# Altium PCB PCB1.PcbDoc
Units mil, origin at the board's own origin, x right, y up, seen from the top; angles counter-clockwise.
Board outline 4625 x 2800 mil, 2 copper layers (Top Layer, Bottom Layer); 25 components, 76 nets, 189 pads, 43 vias.
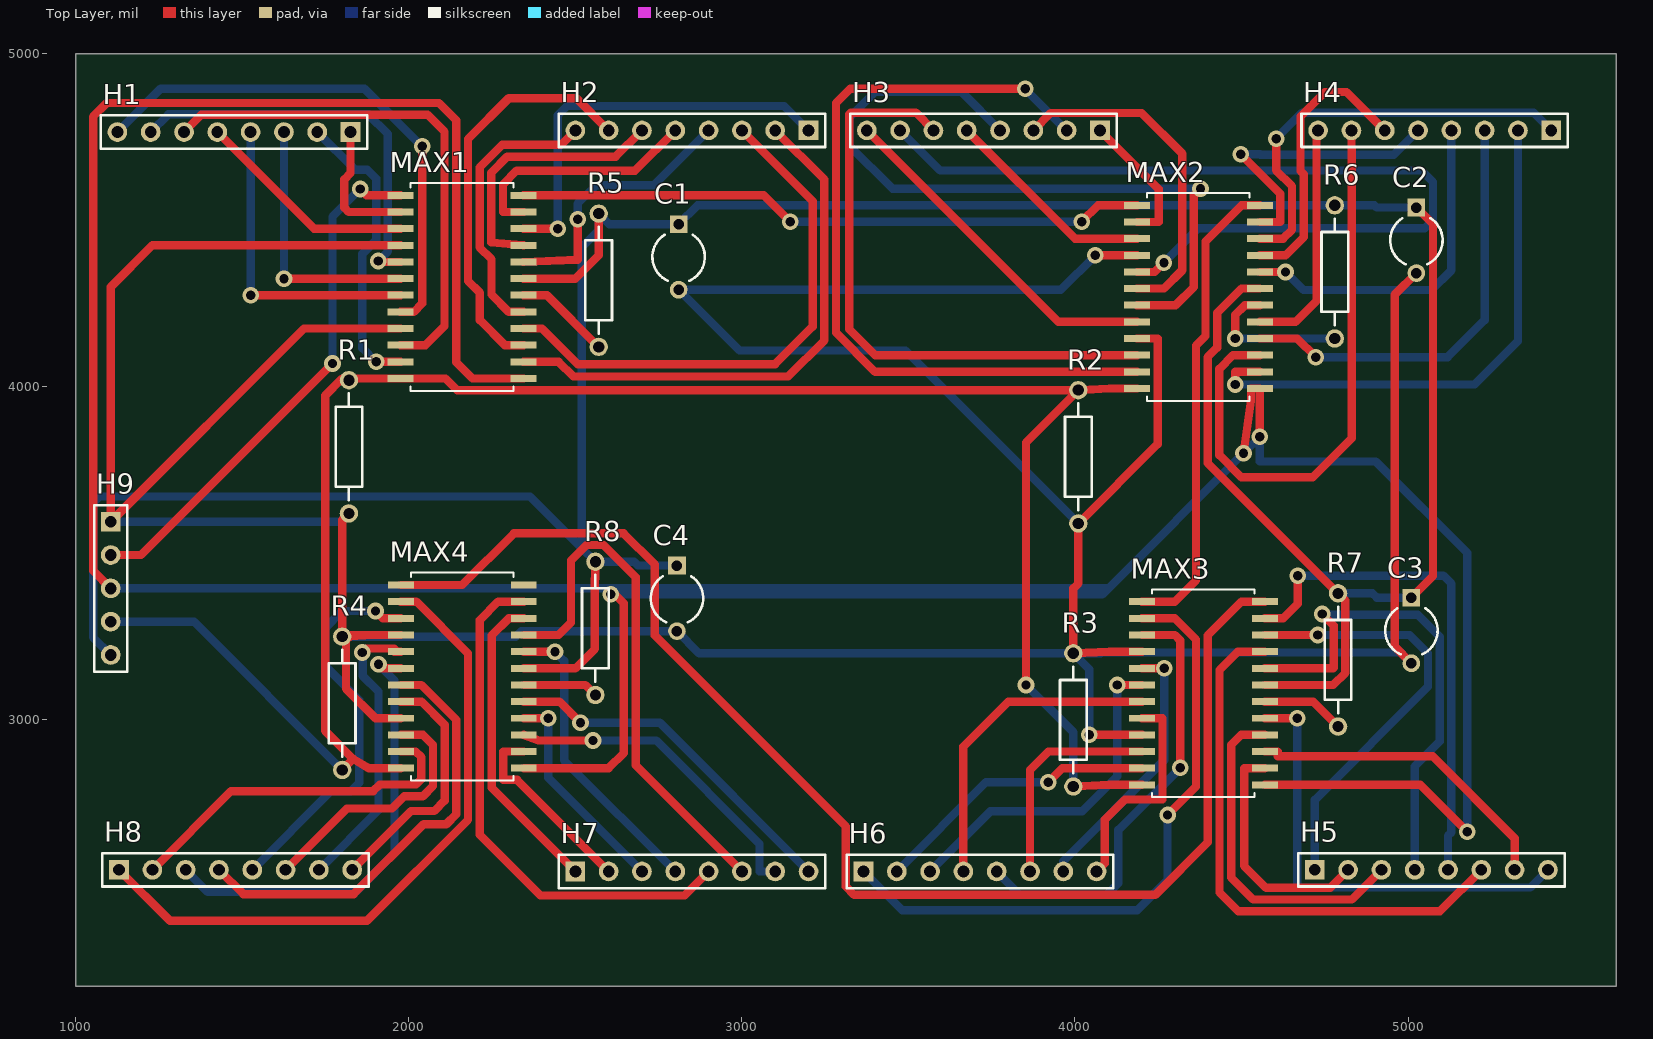
[diagram p0: Top Layer view]
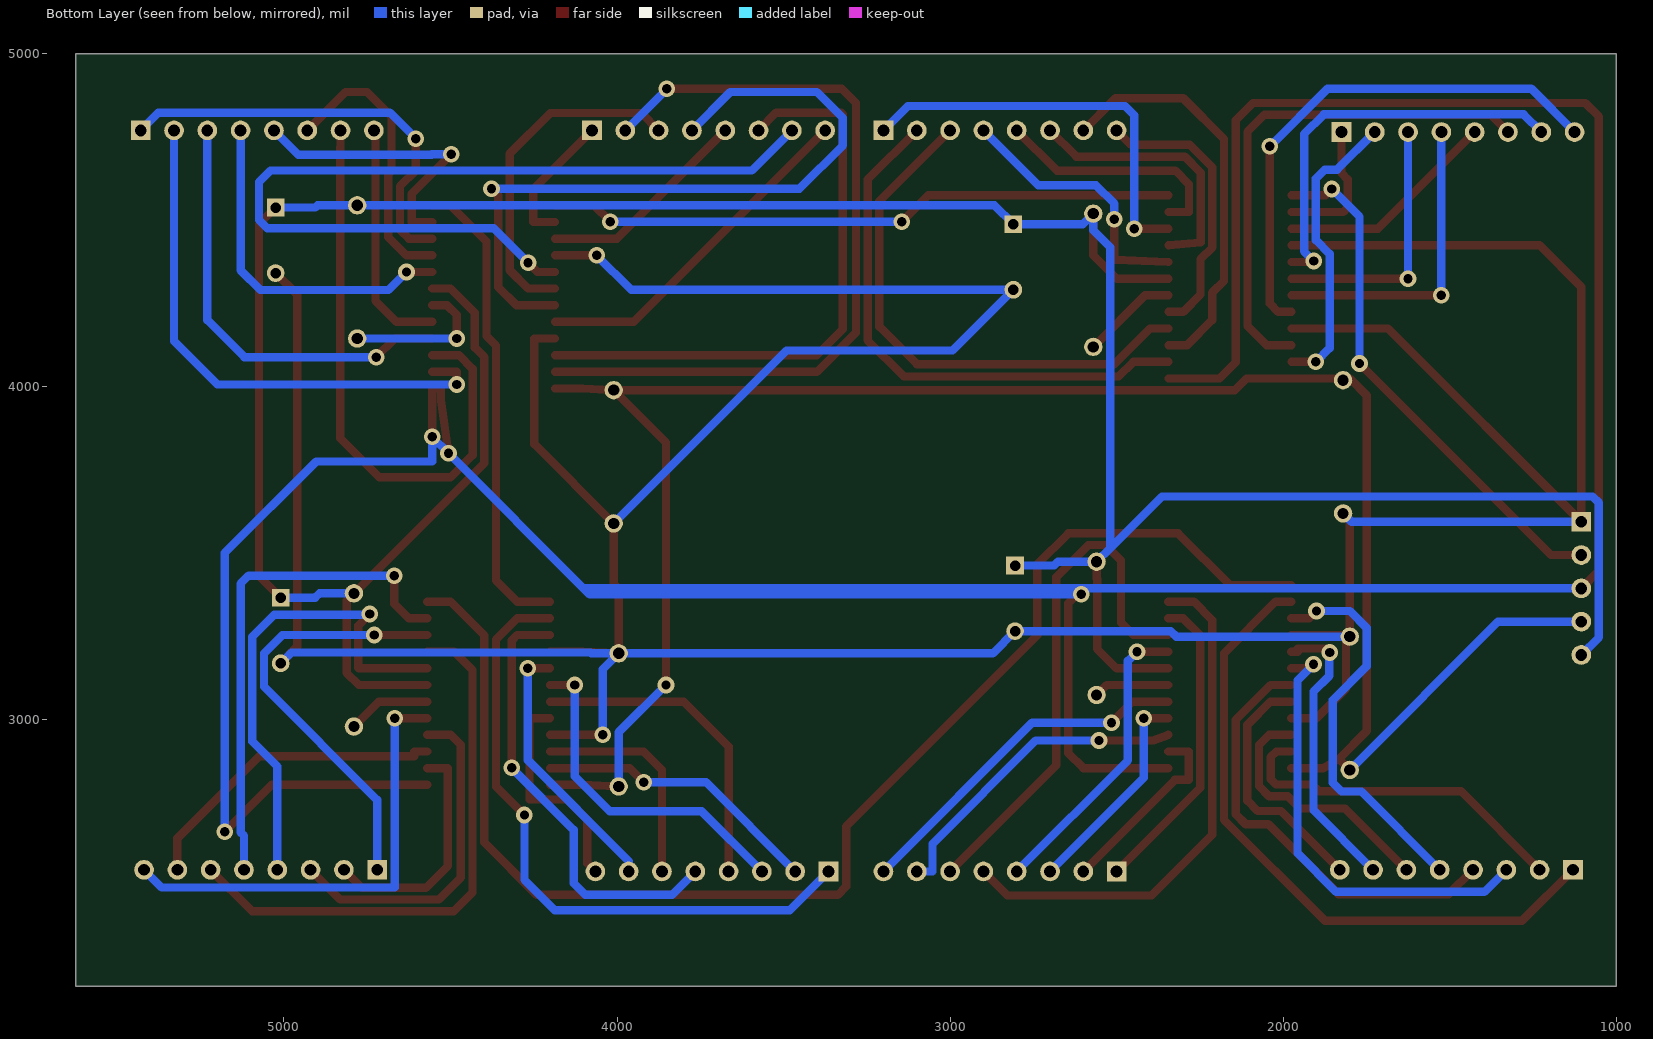
[diagram p1: Bottom Layer view, seen from below]

## Layer stack, top to bottom
Top Solder: solder mask 0.4, Solder Resist, Dk 3.5
Top Layer: signal copper 1.4
Dielectric 1: dielectric 12.6, FR-4, Dk 4.8
Bottom Layer: signal copper 1.4
Bottom Solder: solder mask 0.4, Solder Resist, Dk 3.5

## Board outline
1000,2200 5625,2200 5625,5000 1000,5000

## Design rules (kind name [scope] priority, off if disabled: settings)
Clearance [All] p1: gap=10 ignorepadtopadclearanceinfootprint=FALSE except(0: Arc-Hole Track-Hole SMDPad-Hole THPad-Hole Via-Hole Fill-Hole Poly-Hole Region-Hole Text-Hole)
MinimumSolderMaskSliver [All] p1: minsoldermaskwidth=1
PolygonConnect [All] p1: connectstyle=Relief reliefconductorwidth=10 reliefentries=4 polygonreliefangle="90 Angle" airgapwidth=10
RoutingVias [All] p1: holewidth=28 width=50 viastyle="Through Hole" minholewidth=28 minwidth=50 maxholewidth=28 maxwidth=50
SilkToSilkClearance [All] p1: silktosilkclearance=4
SilkToSolderMaskClearance [IsPad] p1: minsilkscreentomaskgap=4 clearancetoexposedcopper=TRUE
SolderMaskExpansion [All] p1: expansion=4 istentingtop=FALSE
Width [All] p1: maxlimit=25 minlimit=20 preferedwidth=25 minimp=50.000000 maximp=50.000000 favimp=50.000000
27 further rules are at their usual default settings.

## Components (designator, comment, footprint, x,y, rotation, side; value= is the part's Value field where it differs from the comment)
C1 "Cap2" CAPR5-4X5 2810,4390 r270 top value=10µF
C2 "Cap2" CAPR5-4X5 5025,4440 r270 top value=10µF
C3 "Cap2" CAPR5-4X5 5010,3268.43 r270 top value=10µF
C4 "Cap2" CAPR5-4X5 2805,3365 r270 top value=10µF
H1 "Header 8" HDR1X8 1825,4765 r180 top
H2 "Header 8" HDR1X8 3200,4770 r180 top
H3 "Header 8" HDR1X8 4075,4770 r180 top
H4 "Header 8" HDR1X8 5430,4770 r180 top
H5 "Header 8" HDR1X8 4720,2550 r0 top
H6 "Header 8" HDR1X8 3365,2545 r0 top
H7 "Header 8" HDR1X8 2500,2545 r0 top
H8 "Header 8" HDR1X8 1130,2550 r0 top
H9 "Header 5" HDR1X5 1105,3595 r270 top
MAX1 "MAX7219CWGT" *21-0042B_24 2159.5,4300 r0 top
MAX2 "MAX7219CWGT" *21-0042B_24 4370.5,4270 r0 top
MAX3 "MAX7219CWGT" *21-0042B_24 4385.5,3080 r0 top
MAX4 "MAX7219CWGT" *21-0042B_24 2160.5,3130 r0 top
R1 "Res2" AXIAL-0.4 1820,3820 r90 top value=10K
R2 "Res2" AXIAL-0.4 4010,3790 r90 top value=10K
R3 "Res2" AXIAL-0.4 3995,3000 r270 top value=10K
R4 "Res2" AXIAL-0.4 1800,3050 r270 top value=10K
R5 "Res2" AXIAL-0.4 2570,4320 r270 top value=27K
R6 "Res2" AXIAL-0.4 4780,4345 r270 top value=27K
R7 "Res2" AXIAL-0.4 4790,3180 r270 top value=27K
R8 "Res2" AXIAL-0.4 2560,3275 r270 top value=27K

## Footprints (in the part's own frame and the unit in brackets; to place one, negate y for a bottom-side part, rotate by r counter-clockwise, add the part's x,y. Pads: shape width x height; smd on the part's side, far side on the other; paste and mask are expansions set on the pad)
*21-0042B_24 [mil]
  rect 78x21 smd: 1(-184.5,275) 2(-184.5,225) 3(-184.5,175) 4(-184.5,125) 5(-184.5,75) 6(-184.5,25) 7(-184.5,-25) 8(-184.5,-75) 9(-184.5,-125) 10(-184.5,-175) 11(-184.5,-225) 12(-184.5,-275) 13(184.5,-275) 14(184.5,-225) 15(184.5,-175) 16(184.5,-125) 17(184.5,-75) 18(184.5,-25) 19(184.5,25) 20(184.5,75) 21(184.5,125) 22(184.5,175) 23(184.5,225) 24(184.5,275)
  silkscreen extent -154,-312 154,312
AXIAL-0.4 [mm] "Axial Device, Thru-Hole; 2 Leads; 0.4 in Pin Spacing"
  round 1.4 hole 0.85: 1(-5.08,0) 2(5.08,0)
  silkscreen extent -4.06,-1.02 4.06,1.02
CAPR5-4X5 [mm] "Capacitor; 2 Leads"
  rect 1.35x1.35 hole 0.8: 1(-2.5,0)
  round 1.35 hole 0.8: 2(2.5,0)
  silkscreen extent -1.69,-2 1.82,2
HDR1X5 [mm] "Connector; Header; 5 Position"
  rect 1.5x1.5 hole 0.9: 1(0,0)
  round 1.5 hole 0.9: 2(2.54,0) 3(5.08,0) 4(7.62,0) 5(10.16,0)
  silkscreen extent -1.27,-1.27 11.43,1.27
HDR1X8 [mm] "Connector; Header; 8 Position"
  rect 1.5x1.5 hole 0.9: 1(0,0)
  round 1.5 hole 0.9: 2(2.54,0) 3(5.08,0) 4(7.62,0) 5(10.16,0) 6(12.7,0) 7(15.24,0) 8(17.78,0)
  silkscreen extent -1.27,-1.27 19.05,1.27

## Part data
C1 C2 C3 C4: "Capacitor", PackageDescription="Capacitor; 2 Leads", PackageReference=CAPR5-4X5, Published=23-Sep-2002, Publisher="Altium Limited"
H1 H2 H3 H4 H5 H6 H7 H8: "Header, 8-Pin", LatestRevisionDate=17-Jul-2002, LatestRevisionNote="Re-released for DXP Platform.", Publisher="Altium Limited"
H9: "Header, 5-Pin", LatestRevisionDate=17-Jul-2002, LatestRevisionNote="Re-released for DXP Platform.", Publisher="Altium Limited"
R1 R2 R3 R4: library part Res2_1, "Resistor", LatestRevisionDate=17-Jul-2002, LatestRevisionNote="Re-released for DXP Platform.", PackageDescription="Axial Device, Thru-Hole; 2 Leads; 0.4 in Pin Spacing", PackageReference=AXIAL-0.4, Published=8-Jun-2000, Publisher="Altium Limited"
R5 R6 R7 R8: "Resistor", LatestRevisionDate=17-Jul-2002, LatestRevisionNote="Re-released for DXP Platform.", PackageDescription="Axial Device, Thru-Hole; 2 Leads; 0.4 in Pin Spacing", PackageReference=AXIAL-0.4, Published=8-Jun-2000, Publisher="Altium Limited"
MAX1 MAX2 MAX3 MAX4: SnapEDA_Link=https://www.snapeda.com/parts/MAX7219CWG/Maxim%20Integrated/view-part/3218774/?ref=snap

## Via types
v1: diameter 50, hole 28, Top Layer to Bottom Layer, 43 vias

## Nets (pads, with @x,y where several pads share a name; then routed paths per layer and width w, separated by ;. In a path a pad name is that pad's centre, name@x,y a point inside that pad or via, vN(x,y) a via of type N, cw(c..) or ccw(c..) an arc to the next point about the centre after c; other vN are vias at no path point)
NetC1_1: C1.1 C2.1 C3.1 C4.1 H9.5 MAX1.19 MAX2.19 MAX3.19 MAX4.19 R5.1 R6.1 R7.1 R8.1 | length 9847.9
  Top Layer w25: MAX1.19 2500,4325 2570,4395 R5.1 ; MAX4.19 2500,3155 2558.5,3213.5 2558.5,3423 2560,3424.5 R8.1 ; MAX2.19 4500,4295 4427,4222 4427,4117.5 4398.5,4089 4398.5,3771.5 R7.1 4811.5,3358.5 4811.5,3141.5 4775,3105 MAX3.19 ; C3.1 5075,3431.85 5075,4488.43 C2.1
  Bottom Layer w25: H9.5 1052,3248 1052,3652 1071,3671 2364,3671 2519,3516 ; C4.1 2687.57,3463.43 2676,3475 R8.1 2519,3516 ; R7.1 4893,3380 4906.15,3366.85 C3.1 ; C2.1 4905.57,4538.43 4899,4545 R6.1 2866.57,4545 C1.1 2601.57,4488.43 R5.1 2570,4470 2519,4419 2519,3516
NetC1_2: C1.2 C2.2 C3.2 C4.2 H9.1 MAX1.4 MAX1.9 MAX2.4 MAX2.9 MAX3.4 MAX3.9 MAX4.4 MAX4.9 R1.1 R2.1 R3.1 R4.1 | length 13581
  Top Layer w25: R1.1 1800,3600 R4.1 R4.1@1822.72,3251.22 ; MAX1.9 1685,4175 H9.1 1105,4300 1230.5,4425.5 1914.5,4425.5 1915,4425 MAX1.4 ; MAX4.9 1900,3005 1811.5,3093.5 1811.5,3240 R4.1@1822.72,3251.22 ; MAX4.4 1893,3255 ; v1(4043,2955) MAX3.9 ; v1(4061,4395) MAX2.4 ; MAX2.9 4248,4145 4248,3828 R2.1 4010,3410 3995,3395 R3.1 4103,3205 MAX3.4 ; C3.2 4960,3220 4960,4276.57 C2.2 ; R4.1@1822.72,3251.22 1893,3255 ; R4.1@1822.72,3251.22 1826.5,3255 1893,3255
  Bottom Layer w25: H9.1 1795,3595 R1.1 ; R4.1 2321,3250 2337.57,3266.57 C4.2 2871.57,3200 R3.1 ; R2.1 3491,4109 2992.57,4109 C1.2 3957.57,4291.57 v1(4061,4395) ; v1(4043,2955) 4043,3152 R3.1 ; C3.2 4977.5,3202.5 4079.5,3202.5 4077,3200 R3.1
NetH9_2: H9.2 MAX1.1 | length 1591.4
  Top Layer w25: H9.2 1196,3495 v1(1771,4070) ; v1(1854,4594) 1873,4575 MAX1.1
  Bottom Layer w25: v1(1771,4070) 1771,4511 v1(1854,4594)
NetH9_3: H9.3 MAX1.13 MAX2.13 MAX3.13 MAX4.13 | length 12156.2
  Top Layer w25: H9.3 1052,3448 1052,4811 1093.03,4852.03 2090.47,4852.03 2142.5,4800 2142.5,4073.5 2191,4025 MAX1.13 ; MAX4.13 2600,2855 2645.67,2900.67 2645.67,3350 2618.67,3377 v1(2606,3377) ; v1(4506,3801) 4528.5,3959 4528.5,3995 MAX2.13 v1(4555,3850) ; MAX3.13 5037,2805 v1(5178,2664)
  Bottom Layer w25: H9.3 4100,3395 ; v1(2606,3377) 4082,3377 4100,3395 ; v1(5178,2664) 5178,3501 4903,3776 4555,3776 v1(4555,3850) v1(4506,3801) 4100,3395
NetH9_4: H9.4 MAX1.12 MAX2.12 MAX3.12 MAX4.12 R1.2 R2.2 R3.2 R4.2 | length 6202.4
  Top Layer w25: R4.2 1833,2883 ; R1.2 R1.2@1825,4025 ; MAX4.12 1879.5,2855 1833,2883 ; v1(3853,3105) 3853,3833 R2.2 ; R3.2 4103,2805 MAX3.12 ; MAX2.12 4103,3995 R2.2 ; R1.2@1825,4025 1895,4025 MAX1.12 2110,4025 2145,3990 R2.2 ; R1.2@1825,4025 1800,4025 1749,3974 1749,2967 1833,2883
  Bottom Layer w25: H9.4 1355,3295 R4.2 ; v1(3853,3105) 3995,2963 R3.2
NetMAX1_18: MAX1.18 R5.2 | length 290.2
  Top Layer w25: MAX1.18 2415,4275 R5.2
NetMAX1_24: MAX1.24 MAX2.1 | length 1895
  Top Layer w25: MAX1.24 3066,4575 v1(3145,4496) ; v1(4020,4496) 4069,4545 MAX2.1
  Bottom Layer w25: v1(3145,4496) v1(4020,4496)
NetMAX2_18: MAX2.18 R6.2 | length 456
  Top Layer w25: v1(4481,4145) 4481,4216 4510,4245 MAX2.18
  Bottom Layer w25: v1(4481,4145) R6.2
NetMAX2_24: MAX2.24 MAX3.1 | length 1426.8
  Top Layer w25: MAX3.1 4300,3355 4363.5,3418.5 4363.5,4124 4392,4152.5 4392,4437 4500,4545 MAX2.24
NetMAX3_18: MAX3.18 R7.2 | length 251.1
  Top Layer w25: MAX3.18 4715,3055 R7.2
NetMAX3_24: MAX3.24 MAX4.1 | length 4066.2
  Top Layer w25: MAX4.1 2160,3405 2315.06,3560.06 2645.06,3560.06 2738.5,3466.62 2738.5,3253.5 3312,2680 3312,2500 3337,2475 4241,2475 4398.5,2632.5 4398.5,3253.5 4500,3355 MAX3.24
NetMAX4_18: MAX4.18 R8.2 | length 227.4
  Top Layer w25: MAX4.18 2530,3105 R8.2
S1: H1.1 MAX1.2 | length 408.7
  Top Layer w25: H1.1 1825,4641.48 1806.5,4622.98 1806.5,4537.79 1819.29,4525 MAX1.2
S2: H1.5 MAX1.3 | length 670.1
  Top Layer w25: H1.5 1715,4475 MAX1.3
S3: H1.7 MAX1.5 | length 1219.6
  Top Layer w25: v1(1908,4378) 1911,4375 MAX1.5
  Bottom Layer w25: H1.7 1278,4818 1878,4818 1937,4759 1937,4407 v1(1908,4378)
S4: H1.3 MAX1.6 | length 790
  Top Layer w25: v1(1625,4325) MAX1.6
  Bottom Layer w25: v1(1625,4325) H1.3
S5: H1.4 MAX1.7 | length 940
  Top Layer w25: v1(1525,4275) MAX1.7
  Bottom Layer w25: v1(1525,4275) H1.4
S6: H1.8 MAX1.8 | length 1587.9
  Top Layer w25: MAX1.8 2015,4225 2040,4250 v1(2040,4722)
  Bottom Layer w25: H1.8 1255,4895 1867,4895 v1(2040,4722)
S7: H1.6 MAX1.10 | length 1564.3
  Top Layer w25: H1.6 1377.03,4817.03 2055.97,4817.03 2107,4766 2107,4182 2050,4125 MAX1.10
S8: H1.2 MAX1.11 | length 892.4
  Top Layer w25: v1(1901.77,4075) MAX1.11
  Bottom Layer w25: H1.2 1837.94,4652.06 1875,4652.06 1901.77,4625.29 1901.77,4440.51 1860.5,4399.24 1860.5,4116.27 v1(1901.77,4075)
S9: H2.5 MAX1.23 | length 729.1
  Top Layer w25: MAX1.23 2282.5,4525 2282.5,4608 2323.5,4649 2679,4649 H2.5
S10: H2.1 MAX1.22 | length 1237.8
  Top Layer w25: MAX1.22 v1(2447,4475)
  Bottom Layer w25: v1(2447,4475) 2447,4815 2475,4843 3127,4843 H2.1
S11: H2.6 MAX1.21 | length 811.5
  Top Layer w25: MAX1.21 2247.5,4433.5 2247.5,4643 2295.5,4691 2621,4691 H2.6
S12: H2.4 MAX1.20 | length 815.3
  Top Layer w25: MAX1.20 2507,4382 v1(2507,4503)
  Bottom Layer w25: v1(2507,4503) 2507,4550 2562,4605 2735,4605 H2.4
S13: H2.8 MAX1.17 | length 847.6
  Top Layer w25: MAX1.17 2300,4225 2248,4277 2248,4383.5 2212.5,4419 2212.5,4658.71 2280.23,4726.44 2456.44,4726.44 H2.8
S14: H2.3 MAX1.16 | length 1636.9
  Top Layer w25: MAX1.16 2400,4175 2507,4068 3100,4068 3212.5,4180.5 3212.5,4557.5 H2.3
S15: H2.7 MAX1.15 | length 1234
  Top Layer w25: MAX1.15 2288,4125 2213,4200 2213,4282.5 2177.5,4318 2177.5,4744 2300,4866.5 2503.5,4866.5 H2.7
S16: H2.2 MAX1.14 | length 1658.3
  Top Layer w25: MAX1.14 2450,4075 2494,4031 3139,4031 3247.5,4139.5 3247.5,4622.5 H2.2
S17: H3.1 MAX2.2 | length 412.9
  Top Layer w25: H3.1 4251,4594 4251,4495 MAX2.2
S18: H3.5 MAX2.3 | length 645.6
  Top Layer w25: H3.5 4000,4445 MAX2.3
S19: H3.7 MAX2.5 | length 2731.8
  Top Layer w25: MAX2.5 4239,4345 v1(4267,4373)
  Bottom Layer w25: H3.7 3595.29,4649.71 5040.29,4649.71 5075,4615 5075,4501 5050,4476 4370,4476 v1(4267,4373)
S20: H3.3 MAX2.6 | length 1027.9
  Top Layer w25: H3.3 3927.03,4822.03 4200,4822.03 4322,4700.03 4322,4350 4267,4295 MAX2.6
S21: H3.4 MAX2.7 | length 2220.9
  Top Layer w25: MAX2.7 4302,4245 4357,4300 4357,4575 v1(4377,4595)
  Bottom Layer w25: H3.4 3660,4885 3400,4885 3322,4807 3322,4725 3452,4595 v1(4377,4595)
S22: H3.8 MAX2.8 | length 1049.2
  Top Layer w25: H3.8 3950,4195 MAX2.8
S23: H3.6 MAX2.10 | length 1818.3
  Top Layer w25: H3.6 3522,4823 3327,4823 3322,4818 3322,4173 3400,4095 MAX2.10
S24: H3.2 MAX2.11 | length 2403.3
  Top Layer w25: v1(3850.5,4894.5) 3325,4894.5 3282.5,4852 3282.5,4162.5 3400,4045 MAX2.11
  Bottom Layer w25: v1(3850.5,4894.5) H3.2
S25: H4.5 MAX2.23 | length 876.2
  Top Layer w25: v1(4498,4698) 4616.5,4579.5 4616.5,4495 MAX2.23
  Bottom Layer w25: v1(4498,4698) 4555.6,4698 4556.5,4697.1 4957.1,4697.1 H4.5
S26: H4.1 MAX2.22 | length 1280.9
  Top Layer w25: MAX2.22 4625,4445 4651.5,4471.5 4651.5,4602.5 4604,4650 v1(4604,4745)
  Bottom Layer w25: v1(4604,4745) 4682,4823 5377,4823 H4.1
S27: H4.6 MAX2.21 | length 851.8
  Top Layer w25: MAX2.21 4632,4395 4687,4450 4687,4638 4677,4648 4677,4812 4750,4885 4815,4885 H4.6
S28: H4.4 MAX2.20 | length 1041.8
  Top Layer w25: MAX2.20 v1(4632,4345)
  Bottom Layer w25: v1(4632,4345) 4686,4291 5071,4291 5130,4350 H4.4
S29: H4.8 MAX2.17 | length 710.2
  Top Layer w25: MAX2.17 4662,4195 4725,4258 4725,4765 H4.8
S30: H4.3 MAX2.16 | length 1314.2
  Top Layer w25: MAX2.16 4667,4145 v1(4723,4089)
  Bottom Layer w25: v1(4723,4089) 5119,4089 5230,4200 H4.3
S31: H4.7 MAX2.15 | length 1795.2
  Top Layer w25: MAX2.15 4474.5,4095 4433.5,4054 4433.5,3795 4500,3728.5 4713.5,3728.5 4831,3846 4831,4677 H4.7
S32: H4.2 MAX2.14 | length 1647.8
  Top Layer w25: v1(4481,4007) 4481,4045 MAX2.14
  Bottom Layer w25: v1(4481,4007) 5200,4007 5330,4137 H4.2
S33: H5.5 MAX3.23 | length 1535.3
  Top Layer w25: MAX3.23 4625,3305 4669,3349 v1(4669,3433)
  Bottom Layer w25: v1(4669,3433) 5106,3433 5130,3409 5130,2662.61 5120,2652.61 H5.5
S34: H5.1 MAX3.22 | length 1303.6
  Top Layer w25: MAX3.22 v1(4729,3255)
  Bottom Layer w25: H5.1 4720,2760 5060,3100 5060,3200 5005,3255 v1(4729,3255)
S35: H5.6 MAX3.21 | length 1687.3
  Top Layer w25: MAX3.21 4489,3205 4434,3150 4434,2482 4490,2426 5096,2426 H5.6
S36: H5.4 MAX3.20 | length 1495.1
  Top Layer w25: MAX3.20 4775,3155 4776.5,3156.5 4776.5,3283.5 v1(4742,3318)
  Bottom Layer w25: v1(4742,3318) 4744,3316 5029,3316 5095,3250 5095,2935 5020,2860 H5.4
S37: H5.8 MAX3.17 | length 1380
  Top Layer w25: MAX3.17 v1(4667,3005)
  Bottom Layer w25: v1(4667,3005) 4667,2497 5367,2497 H5.8
S38: H5.3 MAX3.16 | length 1026.6
  Top Layer w25: MAX3.16 4499,2955 4469,2925 4469,2527 4535,2461 4831,2461 H5.3
S39: H5.7 MAX3.15 | length 960.7
  Top Layer w25: MAX3.15 4609,2905 4609,2891 5073.73,2891 5320,2644.73 H5.7
S40: H5.2 MAX3.14 | length 716.7
  Top Layer w25: MAX3.14 4508,2855 4508,2562 4574,2496 4766,2496 H5.2
S41: H6.1 MAX3.2 | length 1944.5
  Top Layer w25: MAX3.2 4300,3305 4363.5,3241.5 4363.5,2799.81 v1(4278,2714.31)
  Bottom Layer w25: H6.1 3481,2429 4187,2429 4278,2520 v1(4278,2714.31)
S42: H6.5 MAX3.3 | length 1336.2
  Top Layer w25: MAX3.3 4300,3255 4316,3239 v1(4316,2856)
  Bottom Layer w25: H6.5 3835,2475 4095,2475 4130,2510 4130,2670 v1(4316,2856)
S43: H6.7 MAX3.5 | length 802.5
  Top Layer w25: MAX3.5 v1(4268,3155)
  Bottom Layer w25: H6.7 3965,2576 4268,2879 v1(4268,3155)
S44: H6.3 MAX3.6 | length 1028.5
  Top Layer w25: v1(4127,3105) MAX3.6
  Bottom Layer w25: H6.3 3745.55,2725.55 4021.55,2725.55 4127,2831 v1(4127,3105)
S45: H6.4 MAX3.7 | length 966.9
  Top Layer w25: H6.4 3665,2920 3800,3055 MAX3.7
S46: H6.8 MAX3.8 | length 670.2
  Top Layer w25: H6.8 4089,2569 4089,2700 4150,2761 4263,2761 4263,3005 MAX3.8
S47: H6.6 MAX3.10 | length 663.8
  Top Layer w25: H6.6 3865,2850 3920,2905 MAX3.10
S48: H6.2 MAX3.11 | length 864.4
  Top Layer w25: v1(3920,2813) 3962,2855 MAX3.11
  Bottom Layer w25: H6.2 3733,2813 v1(3920,2813)
S49: H7.5 MAX4.23 | length 1592
  Top Layer w25: MAX4.23 2268,3355 2213,3300 2213,2655 2395,2473 2828,2473 H7.5
S50: H7.1 MAX4.22 | length 930.5
  Top Layer w25: MAX4.22 2300,3305 2248.5,3253.5 2248.5,2796.5 H7.1
S51: H7.6 MAX4.21 | length 1613.4
  Top Layer w25: MAX4.21 2450,3255 2487,3292 2487,3479 2533.06,3525.06 2585,3525.06 2681,3429.06 2681,2864 H7.6
S52: H7.4 MAX4.20 | length 903.5
  Top Layer w25: MAX4.20 v1(2439,3205)
  Bottom Layer w25: v1(2439,3205) 2466.5,3177.5 2466.5,2878.5 H7.4
S53: H7.8 MAX4.17 | length 1066.2
  Top Layer w25: MAX4.17 2452,3055 v1(2515.5,2991.5)
  Bottom Layer w25: v1(2515.5,2991.5) 2753.5,2991.5 H7.8
S54: H7.3 MAX4.16 | length 650.4
  Top Layer w25: MAX4.16 v1(2419,3005)
  Bottom Layer w25: v1(2419,3005) 2419,2826 H7.3
S55: H7.7 MAX4.15 | length 969.5
  Top Layer w25: MAX4.15 2390,2938 v1(2553,2938)
  Bottom Layer w25: v1(2553,2938) 2743,2938 3053,2628 3053,2545 H7.7
S56: H7.2 MAX4.14 | length 576.9
  Top Layer w25: MAX4.14 2283.5,2905 2283.5,2820 2325,2820 H7.2
S57: H8.1 MAX4.2 | length 2002.1
  Top Layer w25: H8.1 1283,2397 1874.5,2397 2177.5,2700 2177.5,3200 2022.5,3355 MAX4.2
S58: H8.5 MAX4.3 | length 1193.6
  Top Layer w25: v1(1900,3327) 1922,3305 MAX4.3
  Bottom Layer w25: H8.5 1765,2785 1825,2785 1851,2811 1851,3059.59 1749,3161.59 1749,3276 1800,3327 v1(1900,3327)
S59: H8.7 MAX4.5 | length 876.9
  Top Layer w25: v1(1860.25,3202.25) 1872.5,3214.5 1956.5,3214.5 1956.5,3205 MAX4.5
  Bottom Layer w25: H8.7 1909,2729 1909,3085.09 1861.5,3132.59 1861.5,3201 v1(1860.25,3202.25)
S60: H8.3 MAX4.6 | length 1361.2
  Top Layer w25: v1(1909,3167) 1921,3155 MAX4.6
  Bottom Layer w25: H8.3 1396,2484 1841,2484 1957,2600 1957,3119 v1(1909,3167)
S61: H8.4 MAX4.7 | length 1335.1
  Top Layer w25: H8.4 1503,2477 1834.5,2477 2044.29,2686.79 2112.29,2686.79 2142.5,2717 2142.5,3000 2037.5,3105 MAX4.7
S62: H8.8 MAX4.8 | length 751.8
  Top Layer w25: H8.8 2006.62,2726.62 2076.75,2726.62 2107.5,2757.37 2107.5,2985.5 2038,3055 MAX4.8
S63: H8.6 MAX4.10 | length 779.2
  Top Layer w25: H8.6 1814,2734 1949.5,2734 1986.13,2770.63 2041.75,2770.63 2072.5,2801.38 2072.5,2925 2042.5,2955 MAX4.10
S64: H8.2 MAX4.11 | length 1054.7
  Top Layer w25: H8.2 1466,2786 1893,2786 1913,2806 2021.5,2806 2037.5,2822 2037.5,2888 2020.5,2905 MAX4.11
pads on no net: MAX4.24

## Silkscreen, mask and mechanical layers (free items; w line width, h text height)
Board outline:
  lines w10: 1000,2205 5615,2205 5625,2215 5625,5005 5620,5000 1000,5000 1000,2225 1000,2205
Mechanical 4:
  text "Pablo Jenne" at 1710,2280 h60